# EAGLE board d2c3a8c0d9d4f1d0c4184d142bcfab09 (EAGLE 7.1.0)
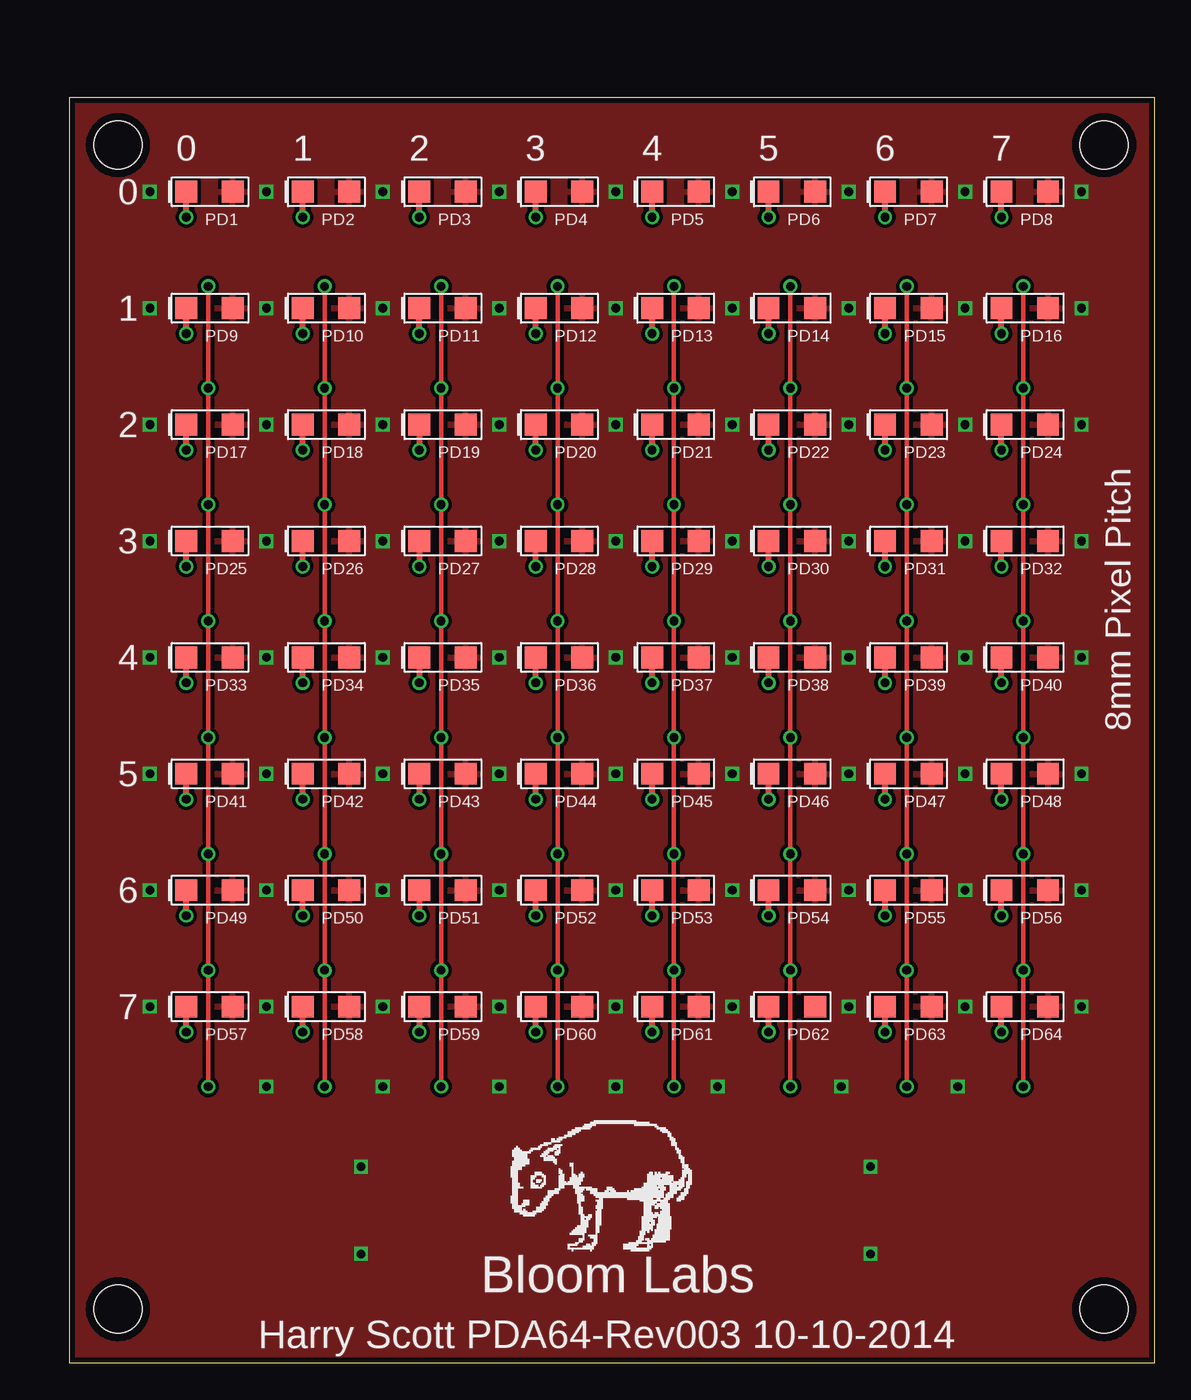
[diagram p0: board, top side]
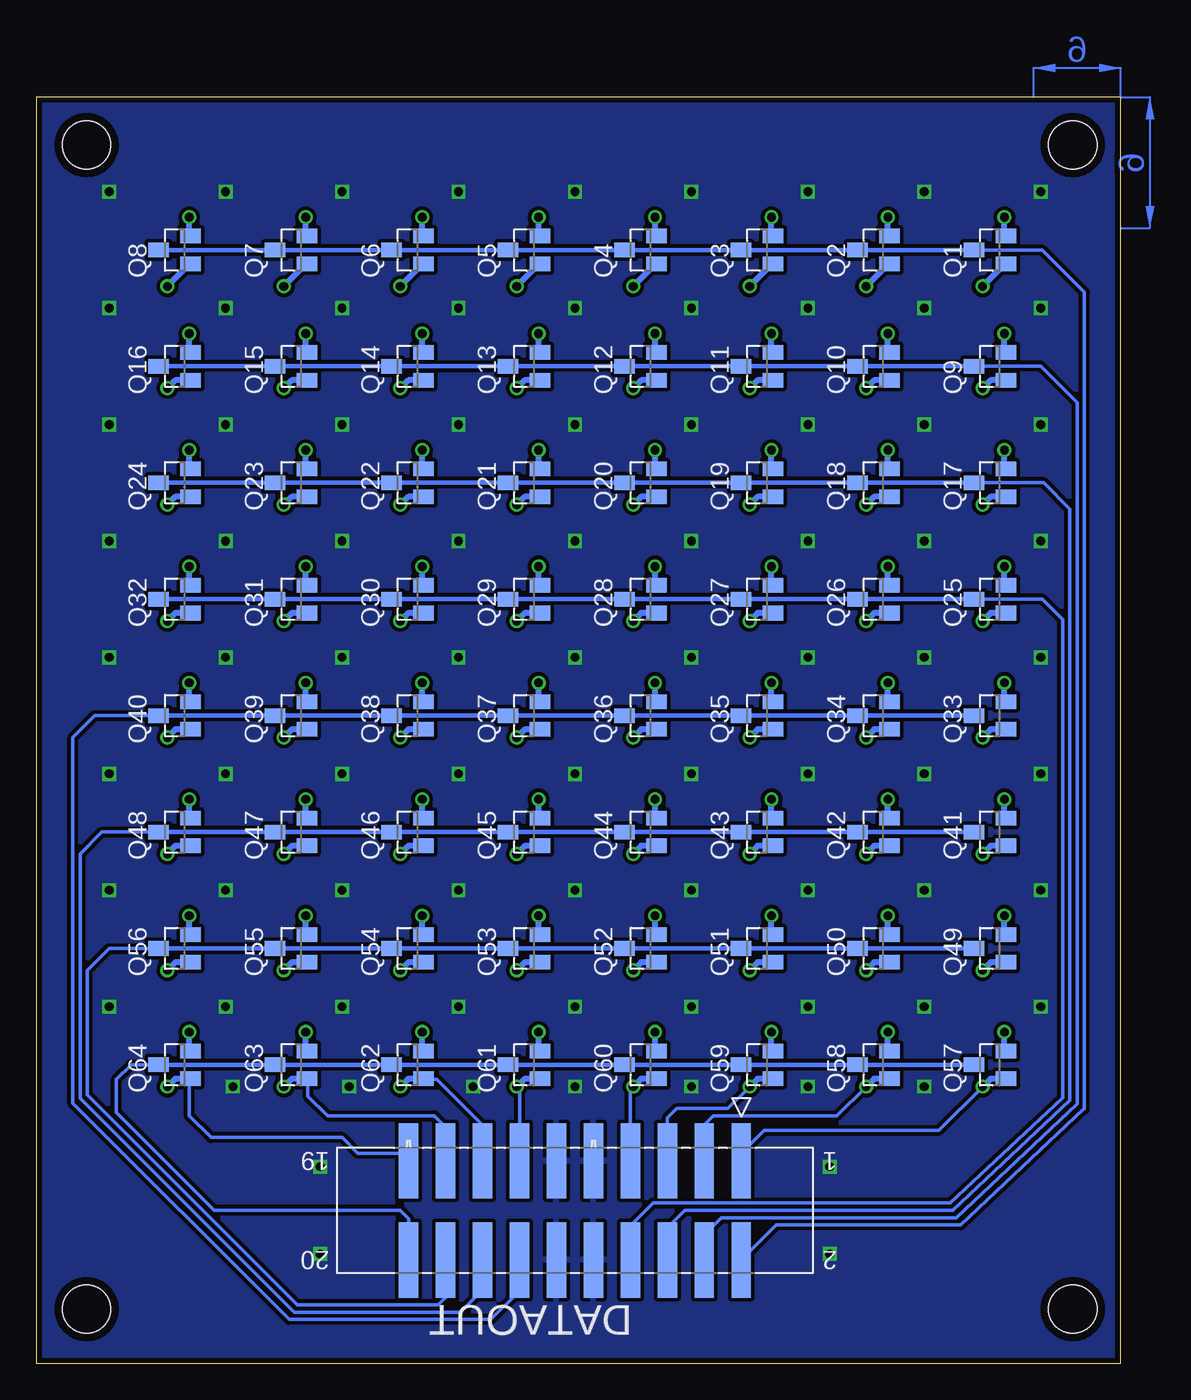
[diagram p1: board, bottom side, seen from below]

Size 74.5 x 87 mm. Coordinates in mm from the lower left corner, seen from the top.
Outline: 0,0 0,87 74.5,87 74.5,0 0,0
Copper layers (1*16): Top 0.0356mm / dielectric 1.5011mm / Bottom 0.0356mm
Design rules "LaenPCBOrder": minimum track width 6mil, minimum drill 13mil, track to track 6mil, track to pad 6mil, pad to pad 6mil, via to via 6mil, smd to smd 6mil, copper to edge 15mil, drill to drill 6mil, minimum pad ring 7mil, minimum via ring 7mil, stop-mask expansion 4mil, vias tented up to drill 0mil, thermal gap 10mil
Net classes: 1 power: drill 0.457 mm; 2 signal: drill 0.457 mm

## Footprints (pad centres in the part's own frame; a part is rotated, then mirrored left to right if it is on the bottom)
3M_N2520-6V0C-RB-WE = smd 1.321 x 5.182: 1 -11.43,-3.404; 2 -11.43,3.404; 3 -8.89,-3.404; 4 -8.89,3.404; 5 -6.35,-3.404; 6 -6.35,3.404; 7 -3.81,-3.404; 8 -3.81,3.404; 9 -1.27,-3.404; 10 -1.27,3.404; 11 1.27,-3.404; 12 1.27,3.404; 13 3.81,-3.404; 14 3.81,3.404; 15 6.35,-3.404; 16 6.35,3.404; 17 8.89,-3.404; 18 8.89,3.404; 19 11.43,-3.404; 20 11.43,3.404
R1206 = smd 1.5 x 1.5: A 3.2,0; C 0,0
SOT23 = smd 1 x 1.4: 1 -0.95,-1.1; 2 0.95,-1.1; 3 0,1.1
STAND-OFF = hole 3.302: 0,0

## Placement (x,y rotation side)
DATAOUT  N2520-6V0C-RB-WE  [3M_N2520-6V0C-RB-WE]  37.5,10.5 180 bottom
PD1  PD15-21B  [R1206]  8,80.5 0 top
PD2  PD15-21B  [R1206]  16,80.5 0 top
PD3  PD15-21B  [R1206]  24,80.5 0 top
PD4  PD15-21B  [R1206]  32,80.5 0 top
PD5  PD15-21B  [R1206]  40,80.5 0 top
PD6  PD15-21B  [R1206]  48,80.5 0 top
PD7  PD15-21B  [R1206]  56,80.5 0 top
PD8  PD15-21B  [R1206]  64,80.5 0 top
PD9  PD15-21B  [R1206]  8,72.5 0 top
PD10  PD15-21B  [R1206]  16,72.5 0 top
PD11  PD15-21B  [R1206]  24,72.5 0 top
PD12  PD15-21B  [R1206]  32,72.5 0 top
PD13  PD15-21B  [R1206]  40,72.5 0 top
PD14  PD15-21B  [R1206]  48,72.5 0 top
PD15  PD15-21B  [R1206]  56,72.5 0 top
PD16  PD15-21B  [R1206]  64,72.5 0 top
PD17  PD15-21B  [R1206]  8,64.5 0 top
PD18  PD15-21B  [R1206]  16,64.5 0 top
PD19  PD15-21B  [R1206]  24,64.5 0 top
PD20  PD15-21B  [R1206]  32,64.5 0 top
PD21  PD15-21B  [R1206]  40,64.5 0 top
PD22  PD15-21B  [R1206]  48,64.5 0 top
PD23  PD15-21B  [R1206]  56,64.5 0 top
PD24  PD15-21B  [R1206]  64,64.5 0 top
PD25  PD15-21B  [R1206]  8,56.5 0 top
PD26  PD15-21B  [R1206]  16,56.5 0 top
PD27  PD15-21B  [R1206]  24,56.5 0 top
PD28  PD15-21B  [R1206]  32,56.5 0 top
PD29  PD15-21B  [R1206]  40,56.5 0 top
PD30  PD15-21B  [R1206]  48,56.5 0 top
PD31  PD15-21B  [R1206]  56,56.5 0 top
PD32  PD15-21B  [R1206]  64,56.5 0 top
PD33  PD15-21B  [R1206]  8,48.5 0 top
PD34  PD15-21B  [R1206]  16,48.5 0 top
PD35  PD15-21B  [R1206]  24,48.5 0 top
PD36  PD15-21B  [R1206]  32,48.5 0 top
PD37  PD15-21B  [R1206]  40,48.5 0 top
PD38  PD15-21B  [R1206]  48,48.5 0 top
PD39  PD15-21B  [R1206]  56,48.5 0 top
PD40  PD15-21B  [R1206]  64,48.5 0 top
PD41  PD15-21B  [R1206]  8,40.5 0 top
PD42  PD15-21B  [R1206]  16,40.5 0 top
PD43  PD15-21B  [R1206]  24,40.5 0 top
PD44  PD15-21B  [R1206]  32,40.5 0 top
PD45  PD15-21B  [R1206]  40,40.5 0 top
PD46  PD15-21B  [R1206]  48,40.5 0 top
PD47  PD15-21B  [R1206]  56,40.5 0 top
PD48  PD15-21B  [R1206]  64,40.5 0 top
PD49  PD15-21B  [R1206]  8,32.5 0 top
PD50  PD15-21B  [R1206]  16,32.5 0 top
PD51  PD15-21B  [R1206]  24,32.5 0 top
PD52  PD15-21B  [R1206]  32,32.5 0 top
PD53  PD15-21B  [R1206]  40,32.5 0 top
PD54  PD15-21B  [R1206]  48,32.5 0 top
PD55  PD15-21B  [R1206]  56,32.5 0 top
PD56  PD15-21B  [R1206]  64,32.5 0 top
PD57  PD15-21B  [R1206]  8,24.5 0 top
PD58  PD15-21B  [R1206]  16,24.5 0 top
PD59  PD15-21B  [R1206]  24,24.5 0 top
PD60  PD15-21B  [R1206]  32,24.5 0 top
PD61  PD15-21B  [R1206]  40,24.5 0 top
PD62  PD15-21B  [R1206]  48,24.5 0 top
PD63  PD15-21B  [R1206]  56,24.5 0 top
PD64  PD15-21B  [R1206]  64,24.5 0 top
Q1  BFT48  [SOT23]  9,76.5 90 bottom
Q2  BFT48  [SOT23]  17,76.5 90 bottom
Q3  BFT48  [SOT23]  25,76.5 90 bottom
Q4  BFT48  [SOT23]  33,76.5 90 bottom
Q5  BFT48  [SOT23]  41,76.5 90 bottom
Q6  BFT48  [SOT23]  49,76.5 90 bottom
Q7  BFT48  [SOT23]  57,76.5 90 bottom
Q8  BFT48  [SOT23]  65,76.5 90 bottom
Q9  BFT48  [SOT23]  9,68.5 90 bottom
Q10  BFT48  [SOT23]  17,68.5 90 bottom
Q11  BFT48  [SOT23]  25,68.5 90 bottom
Q12  BFT48  [SOT23]  33,68.5 90 bottom
Q13  BFT48  [SOT23]  41,68.5 90 bottom
Q14  BFT48  [SOT23]  49,68.5 90 bottom
Q15  BFT48  [SOT23]  57,68.5 90 bottom
Q16  BFT48  [SOT23]  65,68.5 90 bottom
Q17  BFT48  [SOT23]  9,60.5 90 bottom
Q18  BFT48  [SOT23]  17,60.5 90 bottom
Q19  BFT48  [SOT23]  25,60.5 90 bottom
Q20  BFT48  [SOT23]  33,60.5 90 bottom
Q21  BFT48  [SOT23]  41,60.5 90 bottom
Q22  BFT48  [SOT23]  49,60.5 90 bottom
Q23  BFT48  [SOT23]  57,60.5 90 bottom
Q24  BFT48  [SOT23]  65,60.5 90 bottom
Q25  BFT48  [SOT23]  9,52.5 90 bottom
Q26  BFT48  [SOT23]  17,52.5 90 bottom
Q27  BFT48  [SOT23]  25,52.5 90 bottom
Q28  BFT48  [SOT23]  33,52.5 90 bottom
Q29  BFT48  [SOT23]  41,52.5 90 bottom
Q30  BFT48  [SOT23]  49,52.5 90 bottom
Q31  BFT48  [SOT23]  57,52.5 90 bottom
Q32  BFT48  [SOT23]  65,52.5 90 bottom
Q33  BFT48  [SOT23]  9,44.5 90 bottom
Q34  BFT48  [SOT23]  17,44.5 90 bottom
Q35  BFT48  [SOT23]  25,44.5 90 bottom
Q36  BFT48  [SOT23]  33,44.5 90 bottom
Q37  BFT48  [SOT23]  41,44.5 90 bottom
Q38  BFT48  [SOT23]  49,44.5 90 bottom
Q39  BFT48  [SOT23]  57,44.5 90 bottom
Q40  BFT48  [SOT23]  65,44.5 90 bottom
Q41  BFT48  [SOT23]  9,36.5 90 bottom
Q42  BFT48  [SOT23]  17,36.5 90 bottom
Q43  BFT48  [SOT23]  25,36.5 90 bottom
Q44  BFT48  [SOT23]  33,36.5 90 bottom
Q45  BFT48  [SOT23]  41,36.5 90 bottom
Q46  BFT48  [SOT23]  49,36.5 90 bottom
Q47  BFT48  [SOT23]  57,36.5 90 bottom
Q48  BFT48  [SOT23]  65,36.5 90 bottom
Q49  BFT48  [SOT23]  9,28.5 90 bottom
Q50  BFT48  [SOT23]  17,28.5 90 bottom
Q51  BFT48  [SOT23]  25,28.5 90 bottom
Q52  BFT48  [SOT23]  33,28.5 90 bottom
Q53  BFT48  [SOT23]  41,28.5 90 bottom
Q54  BFT48  [SOT23]  49,28.5 90 bottom
Q55  BFT48  [SOT23]  57,28.5 90 bottom
Q56  BFT48  [SOT23]  65,28.5 90 bottom
Q57  BFT48  [SOT23]  9,20.5 90 bottom
Q58  BFT48  [SOT23]  17,20.5 90 bottom
Q59  BFT48  [SOT23]  25,20.5 90 bottom
Q60  BFT48  [SOT23]  33,20.5 90 bottom
Q61  BFT48  [SOT23]  41,20.5 90 bottom
Q62  BFT48  [SOT23]  49,20.5 90 bottom
Q63  BFT48  [SOT23]  57,20.5 90 bottom
Q64  BFT48  [SOT23]  65,20.5 90 bottom
U$1  [STAND-OFF]  3.3,83.71 0 top
U$2  [STAND-OFF]  71.05,83.71 0 top
U$3  [STAND-OFF]  3.3,3.71 0 top
U$4  [STAND-OFF]  71.05,3.71 0 top

## Library data of the parts
DATAOUT = isorg; MPN: N2520-6V0C-RB-WE; OC_FARNELL: 1428504; OC_NEWARK: 34P5344; PACKAGE: Header-20Pin; SUPPLIER: 3M
PD1-PD64 = Photodiodes
Q1-Q64 = transistor-fet
U$1-U$4 = SparkFun-Electromechanical

## Nets
COL0_IN: DATAOUT.1 Q1.1 Q9.1 Q17.1 Q25.1 Q33.1 Q41.1 Q49.1 Q57.1
COL1_IN: DATAOUT.3 Q2.1 Q10.1 Q18.1 Q26.1 Q34.1 Q42.1 Q50.1 Q58.1
COL2_IN: DATAOUT.5 Q3.1 Q11.1 Q19.1 Q27.1 Q35.1 Q43.1 Q51.1 Q59.1
COL3_IN: DATAOUT.7 Q4.1 Q12.1 Q20.1 Q28.1 Q36.1 Q44.1 Q52.1 Q60.1
COL4_IN: DATAOUT.13 Q5.1 Q13.1 Q21.1 Q29.1 Q37.1 Q45.1 Q53.1 Q61.1
COL5_IN: DATAOUT.15 Q6.1 Q14.1 Q22.1 Q30.1 Q38.1 Q46.1 Q54.1 Q62.1
COL6_IN: DATAOUT.17 Q7.1 Q15.1 Q23.1 Q31.1 Q39.1 Q47.1 Q55.1 Q63.1
COL7_IN: DATAOUT.19 Q8.1 Q16.1 Q24.1 Q32.1 Q40.1 Q48.1 Q56.1 Q64.1
N$4: PD1.C Q1.2
N$5: PD2.C Q2.2
N$6: PD3.C Q3.2
N$7: PD4.C Q4.2
N$8: PD5.C Q5.2
N$9: PD6.C Q6.2
N$10: PD7.C Q7.2
N$11: PD8.C Q8.2
N$12: PD9.C Q9.2
N$13: PD10.C Q10.2
N$14: PD11.C Q11.2
N$15: PD12.C Q12.2
N$16: PD13.C Q13.2
N$17: PD14.C Q14.2
N$18: PD15.C Q15.2
N$19: PD16.C Q16.2
N$20: PD17.C Q17.2
N$21: PD18.C Q18.2
N$22: PD19.C Q19.2
N$23: PD20.C Q20.2
N$24: PD21.C Q21.2
N$25: PD22.C Q22.2
N$26: PD23.C Q23.2
N$27: PD24.C Q24.2
N$28: PD25.C Q25.2
N$29: PD26.C Q26.2
N$30: PD27.C Q27.2
N$31: PD28.C Q28.2
N$32: PD29.C Q29.2
N$33: PD30.C Q30.2
N$34: PD31.C Q31.2
N$35: PD32.C Q32.2
N$36: PD33.C Q33.2
N$37: PD34.C Q34.2
N$38: PD35.C Q35.2
N$39: PD36.C Q36.2
N$40: PD37.C Q37.2
N$41: PD38.C Q38.2
N$42: PD39.C Q39.2
N$43: PD40.C Q40.2
N$44: PD41.C Q41.2
N$45: PD42.C Q42.2
N$46: PD43.C Q43.2
N$47: PD44.C Q44.2
N$48: PD45.C Q45.2
N$49: PD46.C Q46.2
N$50: PD47.C Q47.2
N$51: PD48.C Q48.2
N$52: PD49.C Q49.2
N$53: PD50.C Q50.2
N$54: PD51.C Q51.2
N$55: PD52.C Q52.2
N$56: PD53.C Q53.2
N$57: PD54.C Q54.2
N$58: PD55.C Q55.2
N$59: PD56.C Q56.2
N$60: PD57.C Q57.2
N$61: PD58.C Q58.2
N$62: PD59.C Q59.2
N$63: PD60.C Q60.2
N$64: PD61.C Q61.2
N$65: PD62.C Q62.2
N$66: PD63.C Q63.2
N$67: PD64.C Q64.2
ROW0_IN: DATAOUT.2 Q1.3 Q2.3 Q3.3 Q4.3 Q5.3 Q6.3 Q7.3 Q8.3
ROW1_IN: DATAOUT.4 Q9.3 Q10.3 Q11.3 Q12.3 Q13.3 Q14.3 Q15.3 Q16.3
ROW2_IN: DATAOUT.6 Q17.3 Q18.3 Q19.3 Q20.3 Q21.3 Q22.3 Q23.3 Q24.3
ROW3_IN: DATAOUT.8 Q25.3 Q26.3 Q27.3 Q28.3 Q29.3 Q30.3 Q31.3 Q32.3
ROW4_IN: DATAOUT.14 Q33.3 Q34.3 Q35.3 Q36.3 Q37.3 Q38.3 Q39.3 Q40.3
ROW5_IN: DATAOUT.16 Q41.3 Q42.3 Q43.3 Q44.3 Q45.3 Q46.3 Q47.3 Q48.3
ROW6_IN: DATAOUT.18 Q49.3 Q50.3 Q51.3 Q52.3 Q53.3 Q54.3 Q55.3 Q56.3
ROW7_IN: DATAOUT.20 Q57.3 Q58.3 Q59.3 Q60.3 Q61.3 Q62.3 Q63.3 Q64.3
VNEG: DATAOUT.9 DATAOUT.10 DATAOUT.11 DATAOUT.12 PD1.A PD2.A PD3.A PD4.A PD5.A PD6.A PD7.A PD8.A PD9.A PD10.A PD11.A PD12.A PD13.A PD14.A PD15.A PD16.A PD17.A PD18.A PD19.A PD20.A PD21.A PD22.A PD23.A PD24.A PD25.A PD26.A PD27.A PD28.A PD29.A PD30.A PD31.A PD32.A PD33.A PD34.A PD35.A PD36.A PD37.A PD38.A PD39.A PD40.A PD41.A PD42.A PD43.A PD44.A PD45.A PD46.A PD47.A PD48.A PD49.A PD50.A PD51.A PD52.A PD53.A PD54.A PD55.A PD56.A PD57.A PD58.A PD59.A PD60.A PD61.A PD63.A PD64.A

## Tracks (layer width: path | path; a pad name or v marks a point on that pad's centre or on a via)
COL0_IN  (via drill 0.6)
  Top 0.305: v9.5,74 v9.5,67 v9.5,59 v9.5,51 v9.5,43 v9.5,35 v9.5,27 v9.5,19
  Bottom 0.254: 26.07,14.43 24.5,16 12.5,16 v9.5,19
  Bottom 0.406: Q1.1 7.95,75.55 v9.5,74 | Q9.1 8.95,67.55 v9.5,67 | Q17.1 8.95,59.55 v9.5,59 | Q25.1 8.95,51.55 v9.5,51 | Q33.1 8.95,43.55 v9.5,43 | Q41.1 8.95,35.55 v9.5,35 | Q49.1 8.95,27.55 v9.5,27 | Q57.1 8.95,19.55 v9.5,19 | DATAOUT.1 26.07,14.43
COL1_IN  (via drill 0.6)
  Top 0.305: v17.5,74 v17.5,67 v17.5,59 v17.5,51 v17.5,43 v17.5,35 v17.5,27 v17.5,19
  Bottom 0.254: DATAOUT.3 28.61,16.39 28,17 19.5,17 v17.5,19
  Bottom 0.406: Q2.1 15.95,75.55 v17.5,74 | Q10.1 16.95,67.55 v17.5,67 | Q18.1 16.95,59.55 v17.5,59 | Q26.1 16.95,51.55 v17.5,51 | Q34.1 16.95,43.55 v17.5,43 | Q42.1 16.95,35.55 v17.5,35 | Q50.1 16.95,27.55 v17.5,27 | Q58.1 16.95,19.55 v17.5,19
COL2_IN  (via drill 0.6)
  Top 0.305: v25.5,74 v25.5,67 v25.5,59 v25.5,51 v25.5,43 v25.5,35 v25.5,27 v25.5,19
  Bottom 0.254: DATAOUT.5 31.15,16.85 30.5,17.5 27,17.5 v25.5,19
  Bottom 0.406: Q3.1 23.95,75.55 v25.5,74 | Q11.1 24.95,67.55 v25.5,67 | Q19.1 24.95,59.55 v25.5,59 | Q27.1 24.95,51.55 v25.5,51 | Q35.1 24.95,43.55 v25.5,43 | Q43.1 24.95,35.55 v25.5,35 | Q51.1 24.95,27.55 v25.5,27 | Q59.1 24.95,19.55 v25.5,19
COL3_IN  (via drill 0.6)
  Top 0.305: v33.5,74 v33.5,67 v33.5,59 v33.5,51 v33.5,43 v33.5,35 v33.5,27 v33.5,19
  Bottom 0.254: DATAOUT.7 33.69,18.81
  Bottom 0.406: Q4.1 31.95,75.55 v33.5,74 | Q12.1 32.95,67.55 v33.5,67 | Q20.1 32.95,59.55 v33.5,59 | Q28.1 32.95,51.55 v33.5,51 | Q36.1 32.95,43.55 v33.5,43 | Q44.1 32.95,35.55 v33.5,35 | Q52.1 32.95,27.55 v33.5,27 | Q60.1 32.95,19.55 v33.5,19 33.69,18.81
COL4_IN  (via drill 0.6)
  Top 0.305: v41.5,74 v41.5,67 v41.5,59 v41.5,51 v41.5,43 v41.5,35 v41.5,27 v41.5,19
  Bottom 0.254: DATAOUT.13 41.31,18.81
  Bottom 0.406: Q5.1 39.95,75.55 v41.5,74 | Q13.1 40.95,67.55 v41.5,67 | Q21.1 40.95,59.55 v41.5,59 | Q29.1 40.95,51.55 v41.5,51 | Q37.1 40.95,43.55 v41.5,43 | Q45.1 40.95,35.55 v41.5,35 | Q53.1 40.95,27.55 v41.5,27 | Q61.1 40.95,19.55 v41.5,19 41.31,18.81
COL5_IN  (via drill 0.6)
  Top 0.305: v49.5,74 v49.5,67 v49.5,59 v49.5,51 v49.5,43 v49.5,35 v49.5,27 v49.5,19
  Bottom 0.254: DATAOUT.15 43.85,16.35 47,19.5 47.85,19.5 Q62.1
  Bottom 0.406: Q6.1 47.95,75.55 v49.5,74 | Q14.1 48.95,67.55 v49.5,67 | Q22.1 48.95,59.55 v49.5,59 | Q30.1 48.95,51.55 v49.5,51 | Q38.1 48.95,43.55 v49.5,43 | Q46.1 48.95,35.55 v49.5,35 | Q54.1 48.95,27.55 v49.5,27 | Q62.1 48.95,19.55 v49.5,19
COL6_IN  (via drill 0.6)
  Top 0.305: v57.5,74 v57.5,67 v57.5,59 v57.5,51 v57.5,43 v57.5,35 v57.5,27 v57.5,19
  Bottom 0.254: DATAOUT.17 46.39,16.21 47.18,17 54.5,17 55.85,18.35 55.85,19.5
  Bottom 0.406: Q7.1 55.95,75.55 v57.5,74 | Q15.1 56.95,67.55 v57.5,67 | Q23.1 56.95,59.55 v57.5,59 | Q31.1 56.95,51.55 v57.5,51 | Q39.1 56.95,43.55 v57.5,43 | Q47.1 56.95,35.55 v57.5,35 | Q55.1 56.95,27.55 v57.5,27 | v57.5,19 56.95,19.55 Q63.1 55.85,19.5
COL7_IN  (via drill 0.6)
  Top 0.305: v65.5,74 v65.5,67 v65.5,59 v65.5,51 v65.5,43 v65.5,35 v65.5,27 v65.5,19
  Bottom 0.254: 48.93,14.43 52.43,14.43 53.5,15.5 62.5,15.5 64,17 64,19.45 Q64.1
  Bottom 0.406: Q8.1 63.95,75.55 v65.5,74 | Q16.1 64.95,67.55 v65.5,67 | Q24.1 64.95,59.55 v65.5,59 | Q32.1 64.95,51.55 v65.5,51 | Q40.1 64.95,43.55 v65.5,43 | Q48.1 64.95,35.55 v65.5,35 | Q56.1 64.95,27.55 v65.5,27 | v65.5,19 64.95,19.55 Q64.1 63.85,19.5 | DATAOUT.19 48.93,14.43
N$4  (via drill 0.6)
  Top 0.406: v8,78.75 PD1.C
  Bottom 0.406: Q1.2 8,77.55 v8,78.75
N$5  (via drill 0.6)
  Top 0.406: v16,78.75 PD2.C
  Bottom 0.406: Q2.2 16,77.55 v16,78.75
N$6  (via drill 0.6)
  Top 0.406: v24,78.75 PD3.C
  Bottom 0.406: Q3.2 24,77.55 v24,78.75
N$7  (via drill 0.6)
  Top 0.406: v32,78.75 PD4.C
  Bottom 0.406: Q4.2 32,77.55 v32,78.75
N$8  (via drill 0.6)
  Top 0.406: v40,78.75 PD5.C
  Bottom 0.406: Q5.2 40,77.55 v40,78.75
N$9  (via drill 0.6)
  Top 0.406: v48,78.75 PD6.C
  Bottom 0.406: Q6.2 48,77.55 v48,78.75
N$10  (via drill 0.6)
  Top 0.406: v56,78.75 PD7.C
  Bottom 0.406: Q7.2 56,77.55 v56,78.75
N$11  (via drill 0.6)
  Top 0.406: v64,78.75 PD8.C
  Bottom 0.406: Q8.2 64,77.55 v64,78.75
N$12  (via drill 0.6)
  Top 0.406: v8,70.75 PD9.C
  Bottom 0.406: Q9.2 8,69.55 v8,70.75
N$13  (via drill 0.6)
  Top 0.406: v16,70.75 PD10.C
  Bottom 0.406: Q10.2 16,69.55 v16,70.75
N$14  (via drill 0.6)
  Top 0.406: v24,70.75 PD11.C
  Bottom 0.406: Q11.2 24,69.55 v24,70.75
N$15  (via drill 0.6)
  Top 0.406: v32,70.75 PD12.C
  Bottom 0.406: Q12.2 32,69.55 v32,70.75
N$16  (via drill 0.6)
  Top 0.406: v40,70.75 PD13.C
  Bottom 0.406: Q13.2 40,69.55 v40,70.75
N$17  (via drill 0.6)
  Top 0.406: v48,70.75 PD14.C
  Bottom 0.406: Q14.2 48,69.55 v48,70.75
N$18  (via drill 0.6)
  Top 0.406: v56,70.75 PD15.C
  Bottom 0.406: Q15.2 56,69.55 v56,70.75
N$19  (via drill 0.6)
  Top 0.406: v64,70.75 PD16.C
  Bottom 0.406: Q16.2 64,69.55 v64,70.75
N$20  (via drill 0.6)
  Top 0.406: v8,62.75 PD17.C
  Bottom 0.406: Q17.2 8,61.55 v8,62.75
N$21  (via drill 0.6)
  Top 0.406: v16,62.75 PD18.C
  Bottom 0.406: Q18.2 16,61.55 v16,62.75
N$22  (via drill 0.6)
  Top 0.406: PD19.C v24,62.75
  Bottom 0.406: Q19.2 24,61.55 v24,62.75
N$23  (via drill 0.6)
  Top 0.406: v32,62.75 PD20.C
  Bottom 0.406: Q20.2 32,61.55 v32,62.75
N$24  (via drill 0.6)
  Top 0.406: v40,62.75 PD21.C
  Bottom 0.406: Q21.2 40,61.55 v40,62.75
N$25  (via drill 0.6)
  Top 0.406: v48,62.75 PD22.C
  Bottom 0.406: Q22.2 48,61.55 v48,62.75
N$26  (via drill 0.6)
  Top 0.406: v56,62.75 PD23.C
  Bottom 0.406: Q23.2 56,61.55 v56,62.75
N$27  (via drill 0.6)
  Top 0.406: v64,62.75 PD24.C
  Bottom 0.406: Q24.2 64,61.55 v64,62.75
N$28  (via drill 0.6)
  Top 0.406: v8,54.75 PD25.C
  Bottom 0.406: Q25.2 8,53.55 v8,54.75
N$29  (via drill 0.6)
  Top 0.406: v16,54.75 PD26.C
  Bottom 0.406: Q26.2 16,53.55 v16,54.75
N$30  (via drill 0.6)
  Top 0.406: PD27.C v24,54.75
  Bottom 0.406: Q27.2 24,53.55 v24,54.75
N$31  (via drill 0.6)
  Top 0.406: v32,54.75 PD28.C
  Bottom 0.406: Q28.2 32,53.55 v32,54.75
N$32  (via drill 0.6)
  Top 0.406: v40,54.75 PD29.C
  Bottom 0.406: Q29.2 40,53.55 v40,54.75
N$33  (via drill 0.6)
  Top 0.406: v48,54.75 PD30.C
  Bottom 0.406: Q30.2 48,53.55 v48,54.75
N$34  (via drill 0.6)
  Top 0.406: v56,54.75 PD31.C
  Bottom 0.406: Q31.2 56,53.55 v56,54.75
N$35  (via drill 0.6)
  Top 0.406: v64,54.75 PD32.C
  Bottom 0.406: Q32.2 64,53.55 v64,54.75
N$36  (via drill 0.6)
  Top 0.406: v8,46.75 PD33.C
  Bottom 0.406: Q33.2 8,45.55 v8,46.75
N$37  (via drill 0.6)
  Top 0.406: v16,46.75 PD34.C
  Bottom 0.406: Q34.2 16,45.55 v16,46.75
N$38  (via drill 0.6)
  Top 0.406: PD35.C v24,46.75
  Bottom 0.406: Q35.2 24,45.55 v24,46.75
N$39  (via drill 0.6)
  Top 0.406: v32,46.75 PD36.C
  Bottom 0.406: Q36.2 32,45.55 v32,46.75
N$40  (via drill 0.6)
  Top 0.406: v40,46.75 PD37.C
  Bottom 0.406: Q37.2 40,45.55 v40,46.75
N$41  (via drill 0.6)
  Top 0.406: v48,46.75 PD38.C
  Bottom 0.406: Q38.2 48,45.55 v48,46.75
N$42  (via drill 0.6)
  Top 0.406: v56,46.75 PD39.C
  Bottom 0.406: Q39.2 56,45.55 v56,46.75
N$43  (via drill 0.6)
  Top 0.406: v64,46.75 PD40.C
  Bottom 0.406: Q40.2 64,45.55 v64,46.75
N$44  (via drill 0.6)
  Top 0.406: v8,38.75 PD41.C
  Bottom 0.406: Q41.2 8,37.55 v8,38.75
N$45  (via drill 0.6)
  Top 0.406: v16,38.75 PD42.C
  Bottom 0.406: Q42.2 16,37.55 v16,38.75
N$46  (via drill 0.6)
  Top 0.406: PD43.C v24,38.75
  Bottom 0.406: Q43.2 24,37.55 v24,38.75 24,39
N$47  (via drill 0.6)
  Top 0.406: v32,38.75 PD44.C
  Bottom 0.406: Q44.2 32,37.55 v32,38.75
N$48  (via drill 0.6)
  Top 0.406: v40,38.75 PD45.C
  Bottom 0.406: Q45.2 40,37.55 v40,38.75
N$49  (via drill 0.6)
  Top 0.406: v48,38.75 PD46.C
  Bottom 0.406: Q46.2 48,37.55 v48,38.75
N$50  (via drill 0.6)
  Top 0.406: v56,38.75 PD47.C
  Bottom 0.406: Q47.2 56,37.55 v56,38.75
N$51  (via drill 0.6)
  Top 0.406: v64,38.75 PD48.C
  Bottom 0.406: Q48.2 64,37.55 v64,38.75
N$52  (via drill 0.6)
  Top 0.406: v8,30.75 PD49.C
  Bottom 0.406: Q49.2 8,29.55 v8,30.75
N$53  (via drill 0.6)
  Top 0.406: v16,30.75 PD50.C
  Bottom 0.406: Q50.2 16,29.55 v16,30.75
N$54  (via drill 0.6)
  Top 0.406: PD51.C v24,30.75
  Bottom 0.406: Q51.2 24,29.55 v24,30.75 24,31
N$55  (via drill 0.6)
  Top 0.406: v32,30.75 PD52.C
  Bottom 0.406: Q52.2 32,29.55 v32,30.75
N$56  (via drill 0.6)
  Top 0.406: v40,30.75 PD53.C
  Bottom 0.406: Q53.2 40,29.55 v40,30.75
N$57  (via drill 0.6)
  Top 0.406: v48,30.75 PD54.C
  Bottom 0.406: Q54.2 48,29.55 v48,30.75
N$58  (via drill 0.6)
  Top 0.406: v56,30.75 PD55.C
  Bottom 0.406: Q55.2 56,29.55 v56,30.75
N$59  (via drill 0.6)
  Top 0.406: v64,30.75 PD56.C
  Bottom 0.406: Q56.2 64,29.55 v64,30.75
N$60  (via drill 0.6)
  Top 0.406: v8,22.75 PD57.C
  Bottom 0.406: Q57.2 8,21.55 v8,22.75
N$61  (via drill 0.6)
  Top 0.406: v16,22.75 PD58.C
  Bottom 0.406: Q58.2 16,21.55 v16,22.75
N$62  (via drill 0.6)
  Top 0.406: PD59.C v24,22.75
  Bottom 0.406: Q59.2 24,21.55 v24,22.75 24,23
N$63  (via drill 0.6)
  Top 0.406: v32,22.75 PD60.C
  Bottom 0.406: Q60.2 32,21.55 v32,22.75
N$64  (via drill 0.6)
  Top 0.406: v40,22.75 PD61.C
  Bottom 0.406: Q61.2 40,21.55 v40,22.75
N$65  (via drill 0.6)
  Top 0.406: v48,22.75 PD62.C
  Bottom 0.406: Q62.2 48,21.55 v48,22.75
N$66  (via drill 0.6)
  Top 0.406: v56,22.75 PD63.C
  Bottom 0.406: Q63.2 56,21.55 v56,22.75
N$67  (via drill 0.6)
  Top 0.406: v64,22.75 PD64.C
  Bottom 0.406: Q64.2 64,21.55 v64,22.75
ROW0_IN
  Bottom 0.254: Q1.3 5.42,76.5 2.5,73.58 2.5,17.46 2.54,17.46 11,9.5 23.67,9.5 DATAOUT.2
  Bottom 0.305: Q1.3 Q2.3 Q3.3 Q4.3 Q5.3 Q6.3 Q7.3 Q8.3
ROW1_IN
  Bottom 0.254: DATAOUT.4 28.61,8.83 27.44,10 11.3,10 3,17.8 3,66 5.5,68.5 Q9.3
  Bottom 0.305: Q9.3 Q10.3 Q11.3 Q12.3 Q13.3 Q14.3 Q15.3 Q16.3
ROW2_IN
  Bottom 0.254: DATAOUT.6 31.15,9.31 29.96,10.5 11.55,10.5 3.5,18.05 3.5,58.7 5.3,60.5 Q17.3
  Bottom 0.305: Q17.3 Q18.3 Q19.3 Q20.3 Q21.3 Q22.3 Q23.3 Q24.3
ROW3_IN
  Bottom 0.254: DATAOUT.8 33.69,9.45 32.14,11 11.72,11 4,18.22 4,51.09 5.41,52.5 Q25.3
  Bottom 0.305: Q25.3 Q26.3 Q27.3 Q28.3 Q29.3 Q30.3 Q31.3 Q32.3
ROW4_IN
  Bottom 0.254: DATAOUT.14 41.31,4.96 43.27,3 57.13,3 72,17.87 72,43 70.5,44.5 Q40.3
  Bottom 0.305: Q33.3 Q34.3 Q35.3 Q36.3 Q37.3 Q38.3 Q39.3 Q40.3
ROW5_IN
  Bottom 0.254: DATAOUT.16 43.85,5.02 45.37,3.5 56.8,3.5 71.5,18.2 71.5,35 70,36.5 Q48.3
  Bottom 0.305: Q41.3 Q42.3 Q43.3 Q44.3 Q45.3 Q46.3 Q47.3 Q48.3
ROW6_IN
  Bottom 0.254: DATAOUT.18 46.39,4.51 46.9,4 56.58,4 71,18.42 71,27 69.5,28.5 Q56.3
  Bottom 0.305: Q49.3 Q50.3 Q51.3 Q52.3 Q53.3 Q54.3 Q55.3 Q56.3
ROW7_IN
  Bottom 0.254: DATAOUT.20 48.93,9.93 49.5,10.5 62.27,10.5 69,17.23 69,19.5 68,20.5 Q64.3
  Bottom 0.305: Q57.3 Q58.3 Q59.3 Q60.3 Q61.3 Q62.3 Q63.3 Q64.3
VNEG  (via drill 0.6)
  other vias: 13.5,80.5 13.5,19 21.5,19 5.5,56.5 5.5,80.5 21.5,80.5 13.5,72.5 13.5,64.5 13.5,56.5 13.5,48.5 13.5,40.5 13.5,32.5 13.5,24.5 21.5,72.5 21.5,64.5 21.5,56.5 21.5,48.5 21.5,40.5 21.5,32.5 21.5,24.5 29.5,24.5 29.5,32.5 29.5,40.5 29.5,48.5 29.5,56.5 29.5,64.5 29.5,72.5 29.5,80.5 5.5,72.5 5.5,64.5 5.5,48.5 5.5,40.5 5.5,32.5 5.5,24.5 53,19 61,19 55,13.5 55,7.5 44.5,19 37.5,19 29.5,19 20,13.5 20,7.5 37.5,80.5 37.5,72.5 37.5,64.5 37.5,56.5 37.5,48.5 37.5,40.5 37.5,32.5 37.5,24.5 45.5,80.5 45.5,72.5 45.5,64.5 45.5,56.5 45.5,48.5 45.5,40.5 45.5,32.5 45.5,24.5 53.5,80.5 53.5,72.5 53.5,64.5 53.5,56.5 53.5,48.5 53.5,40.5 53.5,32.5 53.5,24.5 61.5,80.5 61.5,72.5 61.5,64.5 61.5,56.5 61.5,48.5 61.5,40.5 61.5,32.5 61.5,24.5 69.5,80.5 69.5,72.5 69.5,64.5 69.5,56.5 69.5,48.5 69.5,40.5 69.5,32.5 69.5,24.5
  pour Top (isolate 0.254): 0,87 74.5,87 74.5,0 0,0
  pour Bottom (isolate 0.254): 0,87 74.5,87 74.5,0 0,0
(copper drawn outside any net)
  shapes: Bottom area x2

## Text on the board
tPlace: 0 | 1 | 2 | 3 | 4 | 5 | 6 | 7 | 0 | 1 | 2 | 3 | 8mm Pixel Pitch | 4 | 5 | 6 | 7 | Bloom Labs | Harry Scott PDA64-Rev003 10-10-2014